# Altium PCB laserdriver1.PcbDoc
Units mm, origin at the board's own origin, x right, y up, seen from the top; angles counter-clockwise.
Board outline 21.1 x 29.9 mm, 2 copper layers (Top Layer, Bottom Layer), stack 1.57 mm thick; 31 components, 25 nets, 129 pads, 32 vias.
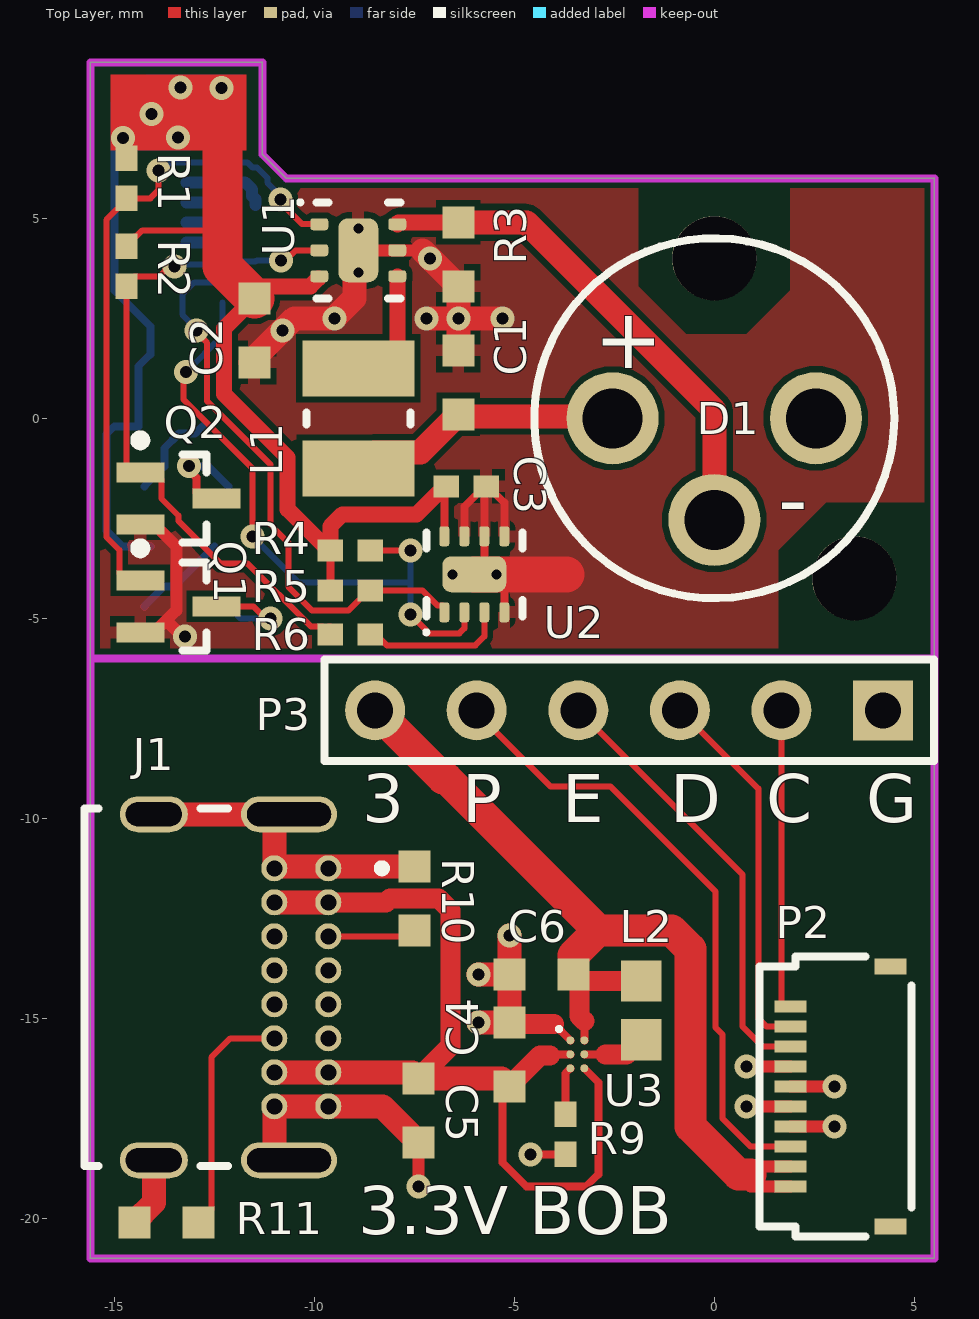
[diagram p0: Top Layer view]
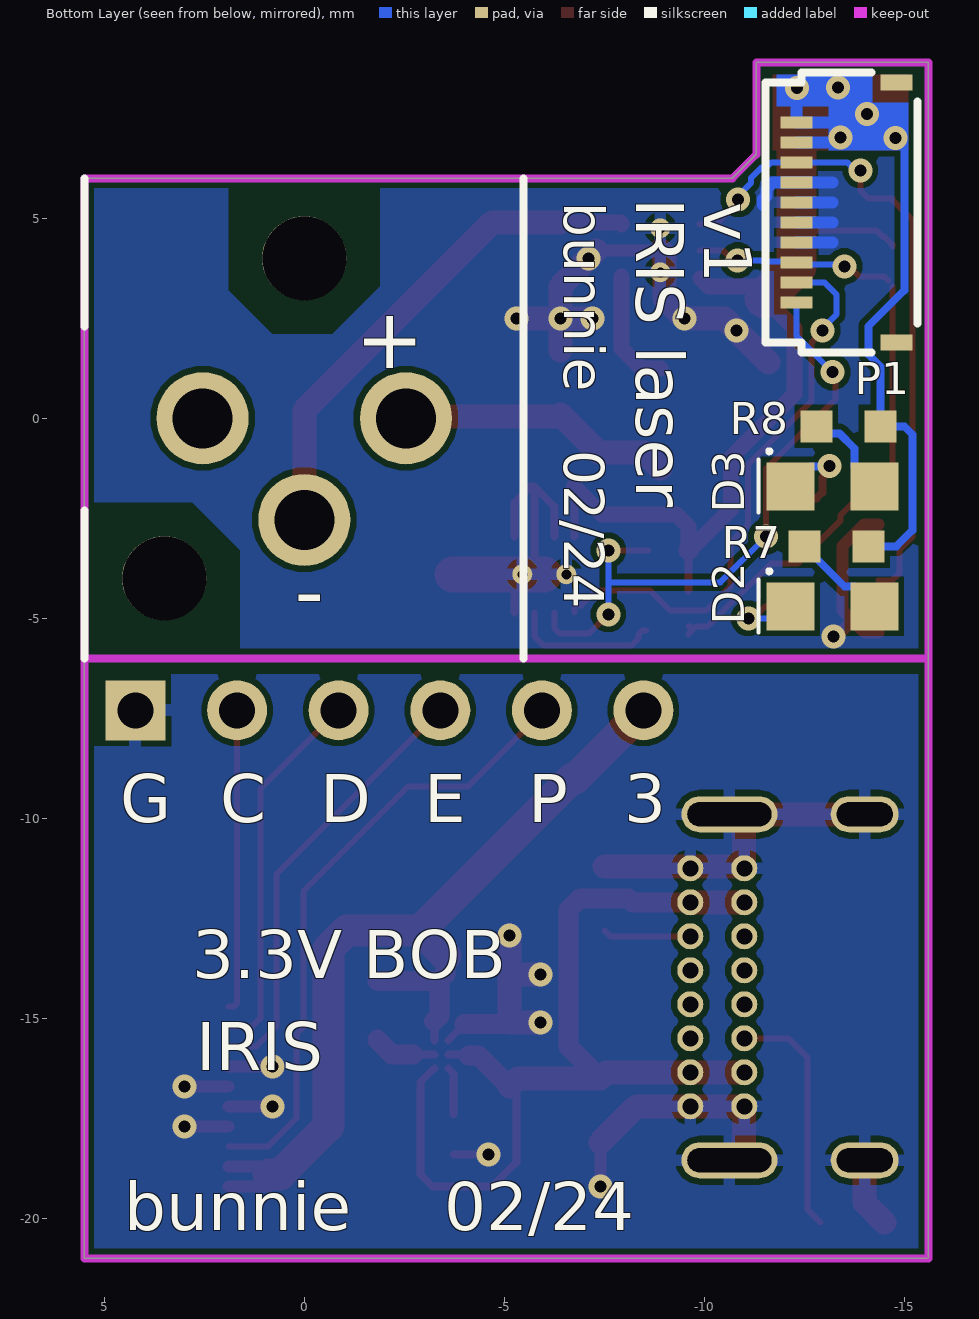
[diagram p1: Bottom Layer view, seen from below]

## Layer stack, top to bottom
Top Solder: solder mask 0.0102, Solder Resist, Dk 3.5
Top Layer: signal copper 0.035
Dielectric 1: dielectric 1.5, FR-4, Dk 4.8
Bottom Layer: signal copper 0.035
Bottom Solder: solder mask 0.0102, Solder Resist, Dk 3.5

## Board outline
-15.6,-21 -15.6,8.9 -11.3,8.9 -11.3,6.6 -10.7,6 5.5,6 5.5,-21

## Design rules (kind name [scope] priority, off if disabled: settings)
Clearance [All] p1: gap=0.15 ignorepadtopadclearanceinfootprint=FALSE except(0: Arc-Hole Track-Hole SMDPad-Hole THPad-Hole Via-Hole Fill-Hole Poly-Hole Region-Hole Text-Hole)
ComponentClearance [All] p1 off: gap=0.254 collisioncheckmode=3 verticalgap=0.254 showdistances=FALSE
HoleToHoleClearance [All] p1: gap=0.2 allowstackedmicrovias=TRUE
MinimumSolderMaskSliver [All] p1 off: minsoldermaskwidth=0.254
PlaneConnect [All] p1: planeconnectstyle=Direct reliefexpansion=0.508 reliefentries=4 reliefconductorwidth=0.254 reliefairgap=0.254
PolygonConnect [All] p1: thpad.connectstyle=Relief thpad.reliefconductorwidth=0.3 thpad.reliefentries=4 thpad.polygonreliefangle="90 Angle" thpad.airgapwidth=0.15 smdpad.connectstyle=Relief smdpad.reliefconductorwidth=0.3 smdpad.reliefentries=4 smdpad.polygonreliefangle="90 Angle" smdpad.airgapwidth=0.15 via.connectstyle=Direct via.reliefconductorwidth=0.254 via.reliefentries=4 via.polygonreliefangle="90 Angle" via.airgapwidth=0.254
RoutingVias [All] p1: holewidth=0.3 width=0.6 viastyle="Through Hole" minholewidth=0.25 minwidth=0.5 maxholewidth=1 maxwidth=1.5
SilkToSilkClearance [All] p1 off: silktosilkclearance=0.254
SilkToSolderMaskClearance [IsPad] p1 off: minsilkscreentomaskgap=0.254 clearancetoexposedcopper=TRUE
SolderMaskExpansion [All] p1: expansion=0.07 istentingtop=FALSE
Width [All] p1: maxlimit=5 minlimit=0.15 preferedwidth=0.15 minimp=50.000000 maximp=50.000000 favimp=50.000000
24 further rules are at their usual default settings.

## Components (designator, comment, footprint, x,y, rotation, side; value= is the part's Value field where it differs from the comment)
C1 "22uF, 6.3V, X5R" B_CAP0603 -6.4,0.9 r90 top
C2 "10uF, 6.3V, X5R" B_CAP0603 -11.5,2.2 r270 top
C3 "0.1uF, 25V, X7R" B_CAP0402 -6.2,-1.7 r0 top
C4 "10uF, 6.3V, X5R" B_CAP0603 -5.125,-15.9 r90 top
C5 "10uF, 6.3V, X5R" B_CAP0603 -7.4,-17.3 r270 top
C6 "10uF, 6.3V, X5R" B_CAP0603 -4.325,-13.9 r180 top
D1 "L1064H1" TO-CAN-MICROJACK 0,0 r0 top
D2 "white LED" B_LED0805 -13.2,-4.7 r180 bottom
D3 "red LED" B_LED0805 -13.2,-1.7 r180 bottom
J1 "USB4085-GF-A_REVB" GCT_USB4085-GF-A_REVB -14.01,-14.225 r270 top
L1 "2.2uH SRP3212-2R2M" B_IND1210_BOURNES -8.9,0 r270 top
L2 "0.47uH 0603" B_IND0603 -1.825,-14.8 r90 top
P1 "FH34SRJ-10S-0.5SH" HRS_FH34SRJ-10S-0.5SH(50) -12.3,5.15 r90 bottom
P2 "FH34SRJ-10S-0.5SH" HRS_FH34SRJ-10S-0.5SH(50) 1.9,-16.95 r90 top
P3 "Header 6" HDR1X6 4.22,-7.3 r180 top
Q1 "DMG1012UW-7" SOT323-3AN -13.4,-4.7 r0 top
Q2 "DMG1012UW-7" SOT323-3AN -13.4,-2 r0 top
R1 "10k, 1%" B_RES0402 -14.7,6 r90 top
R2 "10k, 1%" B_RES0402 -14.7,3.8 r90 top
R3 "0.33 ohm 1%" B_RES0603 -6.4,4.1 r270 top
R4 "3.3k, 1%" B_RES0402 -9.1,-3.3 r180 top
R5 "3.3k, 1%" B_RES0402 -9.1,-4.3 r180 top
R6 "0 ohm" B_RES0402 -9.1,-5.4 r0 top
R7 "51, 1%" B_RES0603 -13.3,-3.2 r180 bottom
R8 "180, 1%" B_RES0603 -13.6,-0.2 r180 bottom
R9 "249k, 1%, +/-200ppm" B_RES0402 -3.725,-17.9 r270 top
R10 "5.1k, 1%" B_RES0603 -7.5,-12 r270 top
R11 "5.1k, 1%" B_RES0603 -13.7,-20.1 r0 top
U1 "TPS92001" TI-WSON65P200X80_HS-7N -8.9,4.2 r0 top
U2 "TMP1075NDRLR" TI-SON50P200X80_HS-9N -6,-3.9 r90 top
U3 "TPS62802" BGA6C35P2X3_70X105X40_NSMD -3.425,-15.9 r0 top

## Footprints (in the part's own frame and the unit in brackets; to place one, negate y for a bottom-side part, rotate by r counter-clockwise, add the part's x,y. Pads: shape width x height; smd on the part's side, far side on the other; paste and mask are expansions set on the pad)
B_CAP0402 [mm] "Capacitor 0402"
  rect 0.63x0.55 smd mask+0.07: 1(-0.5,0) 2(0.5,0)
  body extent -0.53,-0.27 0.53,0.28, height 0.4
B_CAP0603 [mm] "Capacitor 0603"
  rect 0.8x0.8 smd mask+0.07: 1(-0.8,0) 2(0.8,0)
  body extent -0.85,-0.45 0.85,0.45, height 0.9
B_IND0603 [mm] "Inductor 0603"
  rect 1.03x1.02 smd: 1(-0.735,0) 2(0.735,0)
  body extent -0.9,-0.5 0.9,0.5, height 0.8
B_IND1210_BOURNES [mm] "Chip Inductor, 2-Leads, Body 3.20x2.50mm, IPC Medium Density"
  rect 1.4x2.8 smd: 1(-1.25,0) 2(1.25,0)
  silkscreen extent -0.15,-1.3 0.15,1.3, body extent -1.75,-1.4 1.75,1.4, height 1.2
B_LED0805 [mm] "Molded Diode, 2-Leads, Body 2.00x1.25mm, IPC Medium Density"
  rect 1.2x1.2 smd mask+0.07: 1(1.05,0) 2(-1.05,0)
  silkscreen extent -1.85,-0.65 -1.53,0.92, body extent -1,-0.63 1,0.63, height 0.8
B_RES0402 [mm] "Resistor 0402"
  rect 0.63x0.55 smd mask+0.07: 1(-0.5,0) 2(0.5,0)
  body extent -0.53,-0.27 0.53,0.28, height 0.4
B_RES0603 [mm] "Resistor 0603"
  rect 0.8x0.8 smd mask+0.07: 1(-0.8,0) 2(0.8,0)
  body extent -0.85,-0.45 0.85,0.45, height 0.9
BGA6C35P2X3_70X105X40_NSMD [mm] "BGA, 6-Leads, Body 0.70x1.05mmx0.40mm, Pitch 0.35mm"
  round 0.2 smd mask+0.032: A1(-0.175,0.35) A2(0.175,0.35) B1(-0.175,0) B2(0.175,0) C1(-0.175,-0.35) C2(0.175,-0.35)
  silkscreen extent -0.5,0.58 -0.41,0.68, body extent -0.35,-0.53 0.35,0.53, height 0.4
GCT_USB4085-GF-A_REVB [mm]
  round 0.65 hole 0.4 mask+0.07: A1(-2.975,4.36) A4(-2.125,4.36) A5(-1.275,4.36) A6(-0.425,4.36) A7(0.425,4.36) A8(1.275,4.36) A9(2.125,4.36) A12(2.975,4.36) B1(2.975,3.01) B4(2.125,3.01) B5(1.275,3.01) B6(0.425,3.01) B7(-0.425,3.01) B8(-1.275,3.01) B9(-2.125,3.01) B12(-2.975,3.01)
  oval 0.9x1.7 hole 0.6 slot 1.4 at 90 deg: S1(-4.325,0) S2(4.325,0)
  oval 0.9x2.4 hole 0.6 slot 2.1 at 90 deg: S3(-4.325,3.38) S4(4.325,3.38)
  silkscreen extent -4.47,-1.74 4.47,5.8, body extent -4.47,-4.25 4.47,4.92, height 3.46
HDR1X6 [mm] "Connector; Header; 6 Position"
  rect 1.5x1.5 hole 0.9: 1(0,0)
  round 1.5 hole 0.9: 2(2.54,0) 3(5.08,0) 4(7.62,0) 5(10.16,0) 6(12.7,0)
  silkscreen extent -1.27,-1.27 13.97,1.27
HRS_FH34SRJ-10S-0.5SH(50) [mm] "Top/bottom entry, back-lock 0.3mm thick FPC, 10 pins"
  rect 0.4x0.8 smd mask+0.07: 0(-3.25,-2.5) 0(3.25,-2.5)
  rect 0.3x0.8 smd mask+0.07: 1(2.25,0) 2(1.75,0) 3(1.25,0) 4(0.75,0) 5(0.25,0) 6(-0.25,0) 7(-0.75,0) 8(-1.25,0) 9(-1.75,0) 10(-2.25,0)
  silkscreen extent -3.5,-3.03 3.5,0.77, body extent -3.5,-3.03 3.5,0.77, height 1
SOT323-3AN [mm] "SOT323, 3-Leads, Body 2.0x1.3mm, Pitch 0.65mm, Lead Span 2.1mm, IPC Medium Density"
  rect 1.2x0.5 smd: 1(-0.95,0.65) 2(-0.95,-0.65) 3(0.95,0)
  silkscreen extent -1.07,-1.1 0.7,1.57, body extent -0.7,-1.1 0.7,1.1, height 1
TI-SON50P200X80_HS-9N [mm] "SON, 8-Leads, Body 2.00x2.00mm, Pitch 0.50mm, Thermal Pad 1.60x0.89mm, IPC Medium Density"
  rrect50% 0.5x0.25 smd mask+0.07: 1(-0.95,0.75) 2(-0.95,0.25) 3(-0.95,-0.25) 4(-0.95,-0.75) 5(0.95,-0.75) 6(0.95,-0.25) 7(0.95,0.25) 8(0.95,0.75)
  round 0.5 hole 0.25 mask+0: EP(0,0.55) EP(0,-0.55)
  rrect50% 0.9x1.6 smd mask+0.07: EP(0,0)
  silkscreen extent -1.5,-1.2 1.05,1.25, body extent -1.05,-1.05 1.05,1.05, height 0.8
TI-WSON65P200X80_HS-7N [mm] "SON, 6-Leads, Body 2.00x2.00mm, Pitch 0.65mm, Thermal Pad 1.60x0.89mm, IPC Medium Density"
  rrect50% 0.45x0.3 smd mask+0.07: 1(-0.975,0.65) 2(-0.975,0) 3(-0.975,-0.65) 4(0.975,-0.65) 5(0.975,0) 6(0.975,0.65)
  round 0.5 hole 0.25 mask+0: EP(0,-0.55) EP(0,0.55)
  rrect50% 1x1.6 smd mask+0.07: EP(0,0)
  silkscreen extent -1.5,-1.2 1.05,1.25, body extent -1.05,-1.05 1.05,1.05, height 0.8
TO-CAN-MICROJACK [mm] "TO-can footprint, 9mm device, micro-jack sockets"
  round 2.3 hole 1.5 mask+0: 1(2.54,0) 2(0,-2.54) 3(-2.54,0)
  silkscreen extent -4.5,-4.5 4.5,4.5

## Part data
C1: library part "Cap Semi", "Capacitor (Semiconductor SIM Model)", MPN=CL10A226KQ8NRNE, MYPN=C-226-6.3-X5R-0603, VENDOR=Samsung
C2 C4 C5 C6: library part "Cap Semi", "Capacitor (Semiconductor SIM Model)", MPN=CL10A106MQ8NNNC, MYPN=C-106-6.3-X5R-0603, VENDOR=Samsung
C3: library part "Cap Semi", "Capacitor (Semiconductor SIM Model)", MPN=CL05A104KA5NNNC, MYPN=C-104-25-X5R-0402, VENDOR=Samsung
D1: library part LED2, "Typical RED, GREEN, YELLOW, AMBER GaAs LED", MPN=L1064H1, MYPN=D-LASER-1065NM-TO5, VENDOR=Thorlabs
D2: library part LED2, "Typical RED, GREEN, YELLOW, AMBER GaAs LED", MPN=EAST2012WA1, MYPN=D-LED-WHITE1-0805, VENDOR=Everlight
D3: library part LED2, "Typical RED, GREEN, YELLOW, AMBER GaAs LED", MPN=ANY, MYPN=D-LED-RED-0805, VENDOR=ANY
J1: "USB-C (USB TYPE-C) USB 2.0 Receptacle Connector 24 (16+8 Dummy) Position Through Hole, Right Angle, low cost, 3.46mm profile, 16 pin, horizontal, Top mount", MPN=USB4085-GF-A, Package=None, Availability="In Stock", Check_prices=https://www.snapeda.com/parts/USB4085-GF-A/Global+Connector+Technology/view-part/?ref=eda, MF="Global Connector Technology", MP=USB4085-GF-A, Price=None, SnapEDA_Link=https://www.snapeda.com/parts/USB4085-GF-A/Global+Connector+Technology/view-part/?ref=snap, VENDOR=GCT
L1: library part "Inductor Iron", "Magnetic-Core Inductor", MPN=SRP3212-2R2M, MYPN=L-SRP3212-2R2M, VENDOR=Bournes
L2: library part "Inductor Iron", "Magnetic-Core Inductor", MPN=TFM160808ALC-R47MTAA, MYPN=L-TFM160808ALC-R47MTAA, VENDOR=TDK
P1 P2: library part "Header 10", "Header, 10-Pin", LatestRevisionDate=17-Jul-2002, LatestRevisionNote="Re-released for DXP Platform.", MPN=FH34SRJ-10S-0.5SH, MYPN=J-FH34SRJ-10S-0.5SH(50/99), Publisher="Altium Limited", VENDOR=Hirose
P3: "Header, 6-Pin", LatestRevisionDate=17-Jul-2002, LatestRevisionNote="Re-released for DXP Platform.", Publisher="Altium Limited"
Q1 Q2: library part MOSFET-N, "N-Channel MOSFET", LatestRevisionDate=17-Jul-2002, LatestRevisionNote="Re-released for DXP Platform.", MPN=DMG1012UW-7, MYPN=Q-DMG1012UW-7, PackageReference=E3, PackageVersion=1995/1996, Published=8-Jun-2000, Publisher="Altium Limited", VENDOR="Diodes Inc"
R1 R2 R4 R5 R6 R7 R8: library part Res1, "Resistor", MPN=ANY, VENDOR=ANY
  R1 R2 R4 R5: MYPN=R-103-1P-1_16W-0402
  R6: MYPN=R-0R0-1P-1_16W-0402
  R7 R8: MYPN=R-510-1P-1_16W-0603
R3: library part Res1, "Resistor", MPN=ERJ-3BQFR33V, MYPN=R-0R33-1P-1_4W-0603, VENDOR=Panasonic
R9: library part Res1, "Resistor", MPN=RC0402FR-07249KL, MYPN=R-2493-1P-1_16W-0402, VENDOR=Yageo
R10 R11: library part Res1, "Resistor", MPN=RC0603FR-075K1L, MYPN=R-512-1P-1_16W-0603, VENDOR=Yageo
U1: library part TPS92201, "1.5A high efficiency synchronous buck LED driver"
U2: library part TMP1075N, "Temperature sensor, I2C"
U3: "Buck regulator, 4MHz, 0.6A, 1.8V-3.3V, low Iq", MPN=TPS62802YKAR, MYPN=U-TPS62802YKA(T/R), VENDOR=TI

## Free pads (board coordinates)
  round 2.1 hole 2.1 unplated mask+0.7: 0(0,4) 0(3.5,-4)

## Via types
v1: diameter 0.6, hole 0.3, Top Layer to Bottom Layer, tented both sides, 32 vias

## Nets (pads, with @x,y where several pads share a name; then routed paths per layer and width w, separated by ;. In a path a pad name is that pad's centre, name@x,y a point inside that pad or via, vN(x,y) a via of type N, cw(c..) or ccw(c..) an arc to the next point about the centre after c; other vN are vias at no path point)
ENA: P1.8 Q2.1 R2.1 R6.1 U1.2 | length 16.5
  Top Layer w0.15: R2.1 -14.7,-1.2 Q2.1@-14.6,-1.3 ; R2.1@-14.6,3.44 -14.5,3.54 -13.882,3.54 -13.622,3.8 v1(-13.5,3.8) ; Q2.1 -14,-1.35 -13.825,-1.525 -13.825,-2.007 -13.4,-2.432 -13.4,-2.566 -12.333,-3.633 -11.667,-3.633 -10.9,-4.4 -10.885,-4.4 -10.085,-5.2 -9.8,-5.2 R6.1 ; v1(-10.836,3.95) -10.715,3.95 -10.465,4.2 U1.2 ; R6.1@-9.64,-5.2 R6.1@-9.6,-5.2
  Bottom Layer w0.15: v1(-13.5,3.8) -13.45,3.85 -12.35,3.85 P1.8 -12.282,3.918 -11.467,3.918 -11.436,3.949 -10.838,3.949 v1(-10.836,3.95)
ENA_B: P2.3 P3.4 | length 11
  Top Layer w0.15: P3.4 0.7,-11.4 0.7,-15.2 1.2,-15.7 P2.3
GND: C1.2 C2.2 C3.2 P1.4 P1.5 P1.6 P1.7 Q1.2 Q2.2 R3.2 U1.5 U1.EP U2.4 U2.5 U2.6 U2.7 U2.EP | length 28.9
  Top Layer w0.2: U2.7 -6.25,-2.21 -5.74,-1.7 C3.2 ; U2.EP@-6,-3.9 -5.75,-3.65 U2.6 -5.75,-1.75 C3.2 ; U2.EP@-5.45,-3.9 -5.45,-3.981 -5.25,-4.181 U2.4 ; U2.5 -5.25,-2.11 -5.66,-1.7 C3.2
  Top Layer w0.3: Q1.2 -14,-5.35 -13.725,-5.075 ; Q2.2 -14,-2.65 -13.45,-3.2 -13.45,-4.8 -13.725,-5.075 ; v1(-13.226,-5.45) -13.307,-5.45 -13.682,-5.075 -13.725,-5.075 ; U1.EP@-8.9,4.2 U1.5 v1@-7.3,4.2
  Top Layer w0.6: C2.2@-11.6,1.4 -10.5,2.5 v1(-9.5,2.5) -9,3 -9,4.1 U1.EP@-8.9,4.2 ; v1@-7.3,4.2 R3.2 v1(-6.4,2.5) ; v1(-7.2,2.5) v1(-6.4,2.5) ; C1.2 v1(-6.4,2.5) ; v1(-5.3,2.5) v1(-6.4,2.5)
  Top Layer w0.9: U2.EP@-6,-3.9 -5.45,-3.9 -3.7,-3.9
  Bottom Layer w0.3: -13.2,4.4 P1.7 ; -13.2,4.9 P1.6 ; -13.2,5.4 P1.5 ; -13.2,5.9 P1.4 -11.727,5.9 -11.552,5.724 -11.552,5.562 -11.473,5.483 -11.473,5.333
  other v1: -10.8,2.2 -7.109,3.998
GND_B: C4.2 C5.2 C6.2 J1.A1 J1.A12 J1.B1 J1.B12 J1.S1 J1.S2 J1.S3 J1.S4 P2.4 P2.5 P2.6 P2.7 P3.1 R9.2 R10.1 R11.1 U3.A1 | length 27.4
  Top Layer w0.2: C4.2 C4.2@-5.08,-15.145 ; v1(-4.6,-18.4) R9.2 ; -4.005,-15.145 U3.A1
  Top Layer w0.3: v1(-7.4,-19.2) C5.2 ; v1(0.8,-17.2) P2.6 ; v1(0.8,-16.2) P2.4 ; P2.7 v1(3,-17.7) ; P2.5 v1(3,-16.7)
  Top Layer w0.5: C4.2@-5.08,-15.145 -4.005,-15.145
  Top Layer w0.6: R11.1 -14.01,-19.61 J1.S2 ; J1.S1 J1.S3@-10.852,-9.9 ; J1.B12@-10.99,-11.24 -10.99,-10.039 J1.S3@-10.852,-9.9 ; J1.B12@-10.936,-11.2 R10.1 ; J1.S4 -10.852,-18.55 -10.99,-18.411 -10.99,-17.21 J1.B1 J1.A12 -8.3,-17.2 C5.2 ; J1.S3 J1.S3@-10.852,-9.9 ; v1(-5.9,-15.1) C4.2 C6.2 ; v1(-5.9,-13.9) C6.2 ; v1(-5.125,-12.925) C6.2
NetC1_1: C1.1 D1.3 L1.2 | length 7
  Top Layer w0.6: L1.2 -8.5,-0.85 -7.35,-0.85 C1.1 -6.35,0.05 -2.59,0.05 D1.3
NetD1_2: D1.2 R3.1 U1.6 | length 12.6
  Top Layer w0.4: U1.6 -7.925,4.875 -7.9,4.9 R3.1
  Top Layer w0.6: R3.1 -4.7,4.9 0,0.2 D1.2
NetD2_1: D2.1 R7.1 | length 2.4
  Bottom Layer w0.2: D2.1 -13.75,-4.2 -13.5,-4.2 R7.1
NetD2_2: D2.2 Q1.3 | length 2.6
  Top Layer w0.15: Q1.3 -11.522,-4.7 -11.222,-5 v1(-11.1,-5)
  Bottom Layer w0.15: D2.2 -11.85,-5 v1(-11.1,-5)
NetD3_1: D3.1 R8.1 | length 2.3
  Bottom Layer w0.2: D3.1 -13.75,-1.2 -13.75,-0.75 -13.383,-0.383 -12.983,-0.383 R8.1
NetD3_2: D3.2 Q2.3 | length 2.5
  Top Layer w0.2: v1(-13.131,-1.194) -13.131,-1.302 -12.95,-1.483 -12.95,-1.85 -12.8,-2 Q2.3
  Bottom Layer w0.2: v1(-13.131,-1.194) -13.125,-1.2 -12.65,-1.2 D3.2
NetJ1_A5: J1.A5 R10.2 | length 2.2
  Top Layer w0.15: J1.A5 -7.65,-12.95 R10.2
NetJ1_B5: J1.B5 R11.2 | length 6
  Top Layer w0.15: R11.2 -12.575,-19.775 -12.575,-15.975 -12.1,-15.5 J1.B5
NetL1_1: L1.1 U1.4 | length 3
  Top Layer w0.4: L1.1 -8.425,1.25 -7.925,1.75 U1.4
NetR6_2: R6.2 U2.3 | length 3.7
  Top Layer w0.15: R6.2@-8.56,-5.3 -8.46,-5.3 -8.36,-5.4 -8.36,-5.5 -8.185,-5.675 -5.975,-5.675 -5.75,-5.45 U2.3
NetR9_1: R9.1 U3.C1 | length 1.2
  Top Layer w0.2: R9.1 -3.725,-16.375 U3.C1
P3.3V: C2.1 C3.1 P1.1 P1.2 R1.2 R2.2 R4.2 R5.2 R7.2 R8.2 U1.3 U2.8 | length 37.9
  Top Layer w0.15: R2.2 -14.7,4.34 -14.5,4.54 -14.46,4.54 -14.3,4.7 -12.3,4.7 ; v1@-14.6,7.2 -14.3,7.2
  Top Layer w0.2: R5.2 R4.2 ; U2.8 -6.75,-1.75 C3.1 C3.1@-6.74,-1.7
  Top Layer w0.4: U1.3@-9.9,3.5 -10.1,3.3 -11.3,3.3 -11.55,3.05 -11.7,2.9 -11.7,2.8 -12.252,2.248 -12.252,0.604 -10.665,-0.983 -10.665,-2.275 -9.665,-3.275 R4.2@-9.625,-3.275 ; R4.2 -9.6,-2.7 -9.3,-2.4 -7.44,-2.4 C3.1@-6.74,-1.7
  Top Layer w0.5: R4.2@-9.625,-3.275 R4.2
  Top Layer w1: -12.3,7.1 -12.3,4.7 -12.3,3.8 -11.55,3.05 C2.1
  Bottom Layer w0.2: v1@-14.912,7.023 -15,6.936 -15,3.2 -14.1,2.3 -14.1,1.599 -14.4,1.299 R8.2 -15,-0.2 -15.2,-0.4 -15.2,-2.8 -14.8,-3.2 R7.2
  Bottom Layer w0.3: v1@-13.3,6.9 P1.2 ; -13.3,7.4 P1.1 -12.3,7.9
  other v1: -14.776,7.008 -13.412,7.013 -14.066,7.601 -13.339,8.266 -12.315,8.255
P3.3V_B: C6.1 L2.2 P2.9 P2.10 P3.6 U3.A2 | length 23.2
  Top Layer w0.2: U3.A2 -3.25,-15.07
  Top Layer w0.3: 0.9,-19.2 P2.10 ; 0.9,-18.7 P2.9
  Top Layer w0.5: C6.1 -3.525,-13.425 ; -3.248,-15.07 -3.375,-14.943 -3.375,-14.05 -3.36,-14.065 L2.2
  Top Layer w0.8: P3.6 -6.78,-9 -6.7,-9 -2.9,-12.8 ; -3.525,-13.425 -2.9,-12.8 ; 0.9,-18.9 0.6,-18.9 -0.6,-17.7 -0.6,-13.269 -1.069,-12.8 -2.9,-12.8
P5.0V_B: C4.1 C5.1 J1.A4 J1.A9 J1.B4 J1.B9 U3.B1 U3.C2 | length 24.5
  Top Layer w0.2: C4.1 -5.3,-16.875 -5.3,-18.6 -4.7,-19.2 -3.2,-19.2 -2.9,-18.9 -2.9,-16.6 U3.C2 ; -4.103,-15.927 -4.076,-15.9 U3.B1
  Top Layer w0.5: J1.A4 -8.205,-12.1 -8.105,-12 -6.893,-12 -6.6,-12.293 -6.6,-15.7 C5.1 ; C4.1 -4.352,-15.927 -4.103,-15.927
  Top Layer w0.6: J1.B4 J1.A9 -7.55,-16.35 C5.1 -5.325,-16.5 C4.1 ; J1.B9 J1.A4
PWM: P1.3 Q1.1 R1.1 U1.1 | length 16.6
  Top Layer w0.15: Q1.1 -14.7,-4.05 -14.875,-3.875 -14.875,-3.293 -15.2,-2.968 -15.2,4.96 -14.7,5.46 R1.1 -14.1,5.5 -13.9,5.7 v1(-13.9,6.2) ; v1(-10.848,5.47) -10.848,5.398 -10.304,4.855 -9.88,4.855 U1.1
  Bottom Layer w0.15: v1(-13.9,6.2) -13.778,6.2 -13.578,6.4 P1.3 -11.675,6.4 -11.55,6.275 -11.435,6.275 -11.171,6.012 -11.171,5.889 -10.848,5.566 v1(-10.848,5.47)
PWM_B: P2.8 P3.5 | length 15.6
  Top Layer w0.15: P3.5 -5.94,-7.36 -4.1,-9.2 -2.6,-9.2 0.025,-11.825 0.025,-15.225 0.2,-15.4 0.2,-17.5 0.9,-18.2 P2.8
SCL: P1.10 R4.1 U2.2 | length 16
  Top Layer w0.15: v1(-13.203,1.156) -13.275,1.084 -13.275,0.475 -11.542,-1.258 v1(-11.542,-2.958) ; R4.1 v1(-7.6,-3.3) ; v1(-7.6,-4.9) -7.125,-5.375 -6.375,-5.375 -6.25,-5.25 U2.2
  Bottom Layer w0.15: v1(-13.203,1.156) -12.3,2.059 P1.10 ; v1(-11.542,-2.958) -10.4,-4.1 -7.6,-4.1 ; v1(-7.6,-4.9) -7.6,-4.1 ; v1(-7.6,-3.3) -7.6,-4.1
SCL_B: P2.1 P3.2 | length 7.6
  Top Layer w0.15: P3.2 1.68,-14.625 1.755,-14.7 P2.1
SDA: P1.9 R5.1 U2.1 | length 14.2
  Top Layer w0.15: v1(-12.95,2.2) -12.95,2.159 -12.678,1.887 -12.678,0.429 -11.09,-1.159 -11.09,-2.668 -10.65,-3.108 -10.65,-4.211 -10.061,-4.8 -9.14,-4.8 -8.64,-4.3 R5.1 -7.3,-4.3 -6.925,-4.675 -6.8,-4.675 -6.75,-4.725 U2.1
  Bottom Layer w0.15: v1(-12.95,2.2) -12.95,2.242 -13.3,2.592 -13.3,3.1 -13,3.4 P1.9
SDA_B: P2.2 P3.3 | length 9.4
  Top Layer w0.15: P3.3 1.1,-9.26 1.1,-15 1.3,-15.2 P2.2
SW_3.3V: L2.1 U3.B2 | length 1.6
  Top Layer w0.2: U3.B2 -2.72,-15.9
  Top Layer w0.5: -2.72,-15.9 -2.19,-15.9 -2.09,-15.8 -2.085,-15.8 -1.825,-15.54 L2.1
pads on no net: D1.1 J1.A6 J1.A7 J1.A8 J1.B6 J1.B7 J1.B8 P1.0 P2.0

## Polygon pours and split planes (outlines as drawn)
GND_B on Bottom Layer "GND_B_L02_P002" (solid, pour order 2): -15.6,-6.4 5.5,-6.4 5.4,-6.5 5.4,-21 -15.6,-21
GND on Bottom Layer "GND_L02_P000" (solid, remove dead copper, pour order 0): -15.6,8.9 -11.3,8.9 -11.3,6.6 -10.7,6 -1.9,6 -1.9,3.3 -0.7,2.1 0.8,2.1 1.9,3.2 1.9,6 5.5,6 5.5,-2.1 2.8,-2.1 1.6,-3.3 1.6,-6 -15.6,-6
GND on Top Layer "GND_L01_P001" (solid, remove dead copper, pour order 1): -15.6,8.9 -11.3,8.9 -11.3,6.6 -10.7,6 -2,6 -1.9,6.1 -1.9,3.3 -0.7,2.1 0.8,2.1 1.9,3.2 1.9,6 5.5,6 5.5,-2.1 2.8,-2.1 1.6,-3.3 1.6,-6 -15.6,-6

## Keep-outs
Keep-Out Layer:
  lines w0.2: -15.6,-6 -15.6,-21 5.5,-21 5.5,-6 ; -15.6,-6 -15.6,8.9 -11.3,8.9 -11.3,6.6 -10.7,6 5.5,6 5.5,-6 ; -15.6,-6 5.5,-6

## Other copper
Top Layer:
  rectangle net P3.3V: -15.1,6.7 -11.7,8.6
Bottom Layer:
  rectangle net P3.3V: -14.2,7.8 -11.8,8.6
  rectangle net P3.3V: -15.1,6.7 -13.1,7.9

## Silkscreen, mask and mechanical layers (free items; w line width, h text height)
Top Overlay:
  text "+" at -3,1.25 h1.5
  text "-" at 1.6,-2.75 h1.5
  text "3" at -8.8,-10.1 h1.2
  text "P" at -6.3,-10.1 h1.2
  text "E" at -3.8,-10.1 h1.2
  text "D" at -1.1,-10.1 h1.2
  text "C" at 1.3,-10.1 h1.2
  text "G" at 3.8,-10.1 h1.2
  text "3.3V BOB" at -8.9,-20.4 h1.2
Bottom Overlay:
  lines w0.2: -5.475,-6 -5.475,6 ; 5.5,-6 5.5,-2.3 ; 5.5,2.3 5.5,6
  text "IRIS laser" at -8.3,5.5 h1.2 r90
  text "v1" at -10,5.4 h1.2 r90
  text "bunnie" at -6.5,5.4 h1 r90
  text "+" at -3,1.25 h1.5
  text "02/24" at -6.5,-0.8 h1 r90
  text "-" at -0.5,-5.05 h1.5
  text "3" at -8,-10.1 h1.2
  text "P" at -5.6,-10.1 h1.2
  text "E" at -3,-10.1 h1.2
  text "D" at -0.4,-10.1 h1.2
  text "C" at 2.1,-10.1 h1.2
  text "G" at 4.6,-10.1 h1.2
  text "3.3V BOB" at 2.8,-14 h1.2
  text "IRIS" at 2.7,-16.3 h1.2
  text "02/24" at -3.5,-20.3 h1.2
  text "bunnie" at 4.5,-20.3 h1.2
Mechanical 1:
  lines w0.2: -5.5,-6 5.5,-6 5.5,6 -5.5,6 -5.5,-6
Mechanical 15:
  lines w0.254: -19.5,-6 12.6,-6
  lines w0.381: 9.122,17.933 19.58,17.933 43.302,17.933 65.239,17.933 81.819,17.933 96.358,17.933 ; 9.122,20.995 19.58,20.995 43.302,20.995 65.239,20.995 81.819,20.995 96.358,20.995 ; 9.122,24.057 19.58,24.057 43.302,24.057 65.239,24.057 81.819,24.057 96.358,24.057 ; 9.122,27.119 19.58,27.119 43.302,27.119 65.239,27.119 81.819,27.119 96.358,27.119 ; 9.122,30.181 19.58,30.181 43.302,30.181 65.239,30.181 81.819,30.181 96.358,30.181 ; 9.122,33.243 19.58,33.243 43.302,33.243 65.239,33.243 81.819,33.243 96.358,33.243 ; 9.122,36.306 96.358,36.306 ; 19.58,39.368 19.58,14.871 ; 43.302,39.368 43.302,14.871 ; 65.239,39.368 65.239,14.871 ; 81.819,39.368 81.819,14.871 ; 19.58,14.871 9.122,14.871 9.122,39.368 96.358,39.368 96.358,14.871 81.819,14.871 ; 19.58,14.871 43.302,14.871 ; 43.302,14.871 65.239,14.871 ; 65.239,14.871 81.819,14.871
  text "Layer" at 10.907,37.071 h1.53
  text "Name" at 21.365,37.071 h1.53
  text "Material" at 45.087,37.071 h1.53
  text "Thickness" at 67.024,37.071 h1.53
  text "Constant" at 83.604,37.071 h1.53
  text "Top Overlay" at 21.365,34.009 h1.53
  text "Top Solder" at 21.365,30.947 h1.53
  text "Solder Resist" at 45.087,30.947 h1.53
  text "0.010mm" at 67.024,30.947 h1.53
  text "3.5" at 83.604,30.947 h1.53
  text "1" at 10.907,27.885 h1.53
  text "Top Layer" at 21.365,27.885 h1.53
  text "0.035mm" at 67.024,27.885 h1.53
  text "Dielectric 1" at 21.365,24.823 h1.53
  text "FR-4" at 45.087,24.823 h1.53
  text "1.500mm" at 67.024,24.823 h1.53
  text "4.8" at 83.604,24.823 h1.53
  text "2" at 10.907,21.761 h1.53
  text "Bottom Layer" at 21.365,21.761 h1.53
  text "0.035mm" at 67.024,21.761 h1.53
  text "Bottom Solder" at 21.365,18.698 h1.53
  text "Solder Resist" at 45.087,18.698 h1.53
  text "0.010mm" at 67.024,18.698 h1.53
  text "3.5" at 83.604,18.698 h1.53
  text "Bottom Overlay" at 21.365,15.636 h1.53
  text "+/- 0.1mm" at 78.1,12.9 h1.5
  text "Total board thickness:" at 10.907,12.574 h1.53
  text "1.590mm" at 67.024,12.574 h1.53
  text "Finish: HASL" at 11.4,8.4 h1.5
  text "Soldermask: green   Silk: white" at 11.3,5.3 h1.5
  text "No panelization, but note V-score requirement" at 11.2,1.6 h1.5
  text "V-score along this line" at 14.1,-6.6 h1.2

## Text inside footprints (layer, text, board x,y; h text height)
J1: Mechanical 13 "PCB EDGE" at -15.58,-19.54 h0.81 r270